# EAGLE board 24V_to_1V8_1A_switching_regulator (EAGLE 8.5.0)
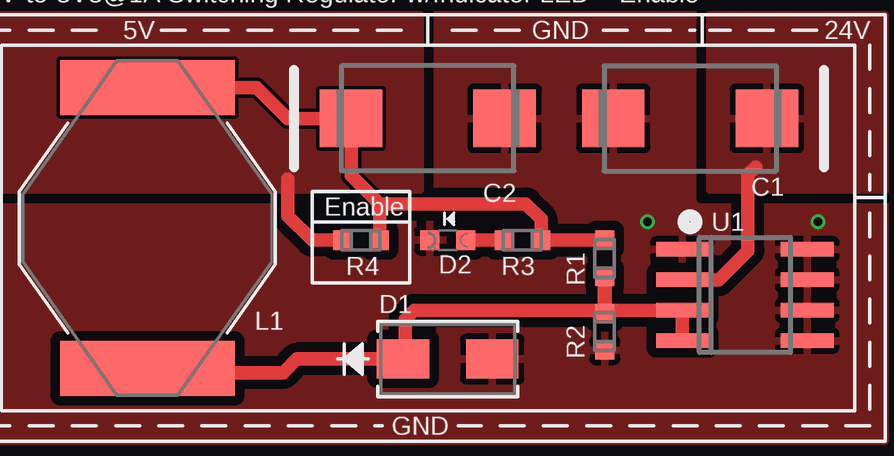
[diagram p0: board, top side]
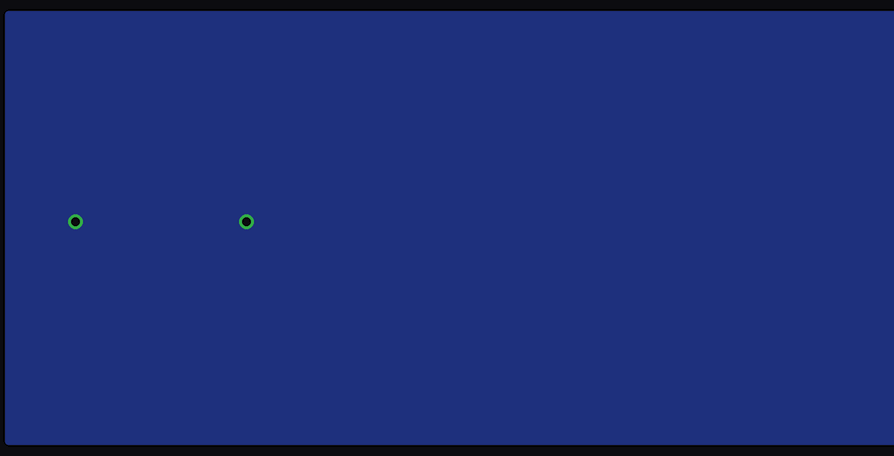
[diagram p1: board, bottom side, seen from below]

No outline drawn. Coordinates in mm, seen from the top.
Copper layers (1*16): Top 0.035559375mm / dielectric 1.6mm / Bottom 0.035559375mm
Design rules "oshpark-2layer": minimum track width 6mil, minimum drill 10mil, track to track 6mil, track to pad 6mil, pad to pad 6mil, via to via 6mil, smd to smd 6mil, copper to edge 15mil, drill to drill 6mil, minimum pad ring 5mil, minimum via ring 5mil, stop-mask expansion 2.5mil, vias tented up to drill 0mil, thermal gap 10mil

## Footprints (pad centres in the part's own frame; a part is rotated, then mirrored left to right if it is on the bottom)
CT7343 = smd 2.6 x 2.4: + -3.2,0; - 3.2,0
SMA = smd 2.18 x 1.63: 1 -1.857,0; 2 1.857,0
CHIPLED_0603 = smd 0.8 x 0.8: A 0,-0.75; C 0,0.75
UP2B = smd 2.311 x 7.29: 1 -5.855,0; 2 5.855,0
RC0603N = smd 0.756 x 0.8: 1 -0.778,0; 2 0.778,0
SOIC8 = smd 0.6 x 2.2: 1 -1.905,-2.6; 2 -0.635,-2.6; 3 0.635,-2.6; 4 1.905,-2.6; 5 1.905,2.6; 6 0.635,2.6; 7 -0.635,2.6; 8 -1.905,2.6

## Placement (x,y rotation side)
C1  15uF  [CT7343]  29.97,13.46 180 top
C2  220uF  [CT7343]  19.05,13.46 0 top
D1  B260A-13-F  [SMA]  19.88,3.43 0 top
D2  APT1608CGCK  [CHIPLED_0603]  19.88,8.38 90 top
L1  68uH  [UP2B]  7.37,8.89 90 top
R1  3.01K  [RC0603N]  26.42,7.62 90 top
R2  6.49K  [RC0603N]  26.42,4.57 90 top
R3  100 OHM  [RC0603N]  22.99,8.38 0 top
R4  0 OHM  [RC0603N]  16.26,8.38 180 top
U1  MIC4680YM-TR  [SOIC8]  32.26,6.1 270 top

## Library data of the parts
C1 C2 = openag-capacitors
D1 = openag-diodes
D2 = openag-diodes; POPULATE: YES; VERIFIED: NO
L1 = openag-inductors
R1 R2 = openag-resistors
R3 R4 = openag-resistors; POPULATE: YES; VERIFIED: NO
U1 = openag-regulators

## Nets
+5V: R4.2
+24V: C1.+ U1.2
GND: C1.- C2.- D1.2 D2.C R2.1 U1.1 U1.5 U1.6 U1.7 U1.8
N$5: D2.A R3.1
N$6: C2.+ L1.2 R1.2 R3.2 R4.1
N$7: D1.1 L1.1 R1.1 R2.2 U1.3 U1.4

## Tracks (layer width: path | path; a pad name or v marks a point on that pad's centre or on a via)
+5V
  Top 0.559: R4.2 14.22,8.38 13.21,9.4 13.21,10.92
  pour Top: 0,17.78 0,10.48 18.73,10.48 18.73,17.78
+24V
  Top 0.559: U1.2 31.18,6.73 32.38,7.94 32.38,11.11 32.7,11.43
  pour Top: 38.1,17.78 30.8,17.78 30.8,10.48 38.1,10.48
GND  (via drill 0.35)
  other vias: 28.19,9.14 35.31,9.14
  pour Top (isolate 0.406, rank 2): 0,0 38.1,0 38.1,17.78 0,17.78
  pour Bottom (isolate 0.406): 0,0 38.1,0 38.1,17.78 0,17.78
N$5
  Top 0.559: R3.1 D2.A
N$6
  Top 0.559: L1.2 11.93,14.74 13.21,13.46 C2.+ 15.85,11.07 17.03,9.89 | 17.03,9.89 23.13,9.89 23.77,9.26 R3.2 23.78,8.4 R1.2 | R4.1 17.03,9.89
N$7
  Top 0.559: 26.53,5.46 U1.3 U1.4 | 26.53,5.46 R2.2 | L1.1 7.54,2.86 13.02,2.86 13.59,3.43 D1.1 18.1,3.51 18.1,5.08 18.48,5.46 26.53,5.46
  Top 0.61: R1.1 R2.2

## Text on the board
tPlace: 24V-to-3V3@1A Switching Regulator w/Indicator LED + Enable | 5V | GND | 24V | Enable | GND